# EAGLE board isoHV v0.7 (EAGLE 9.4.1)
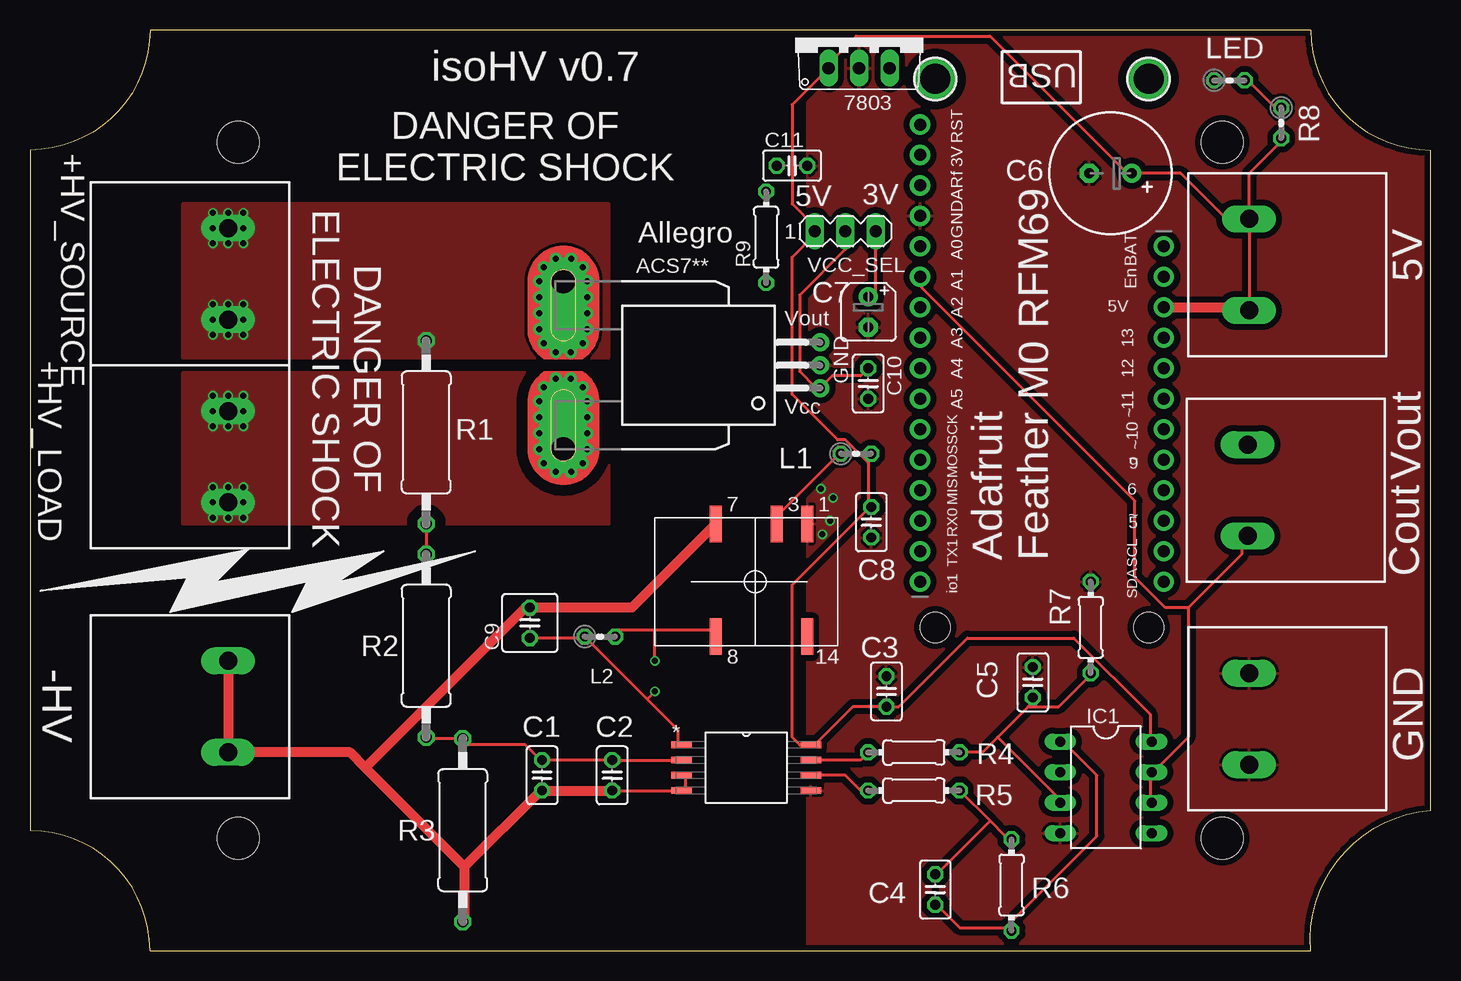
[diagram p0: board, top side]
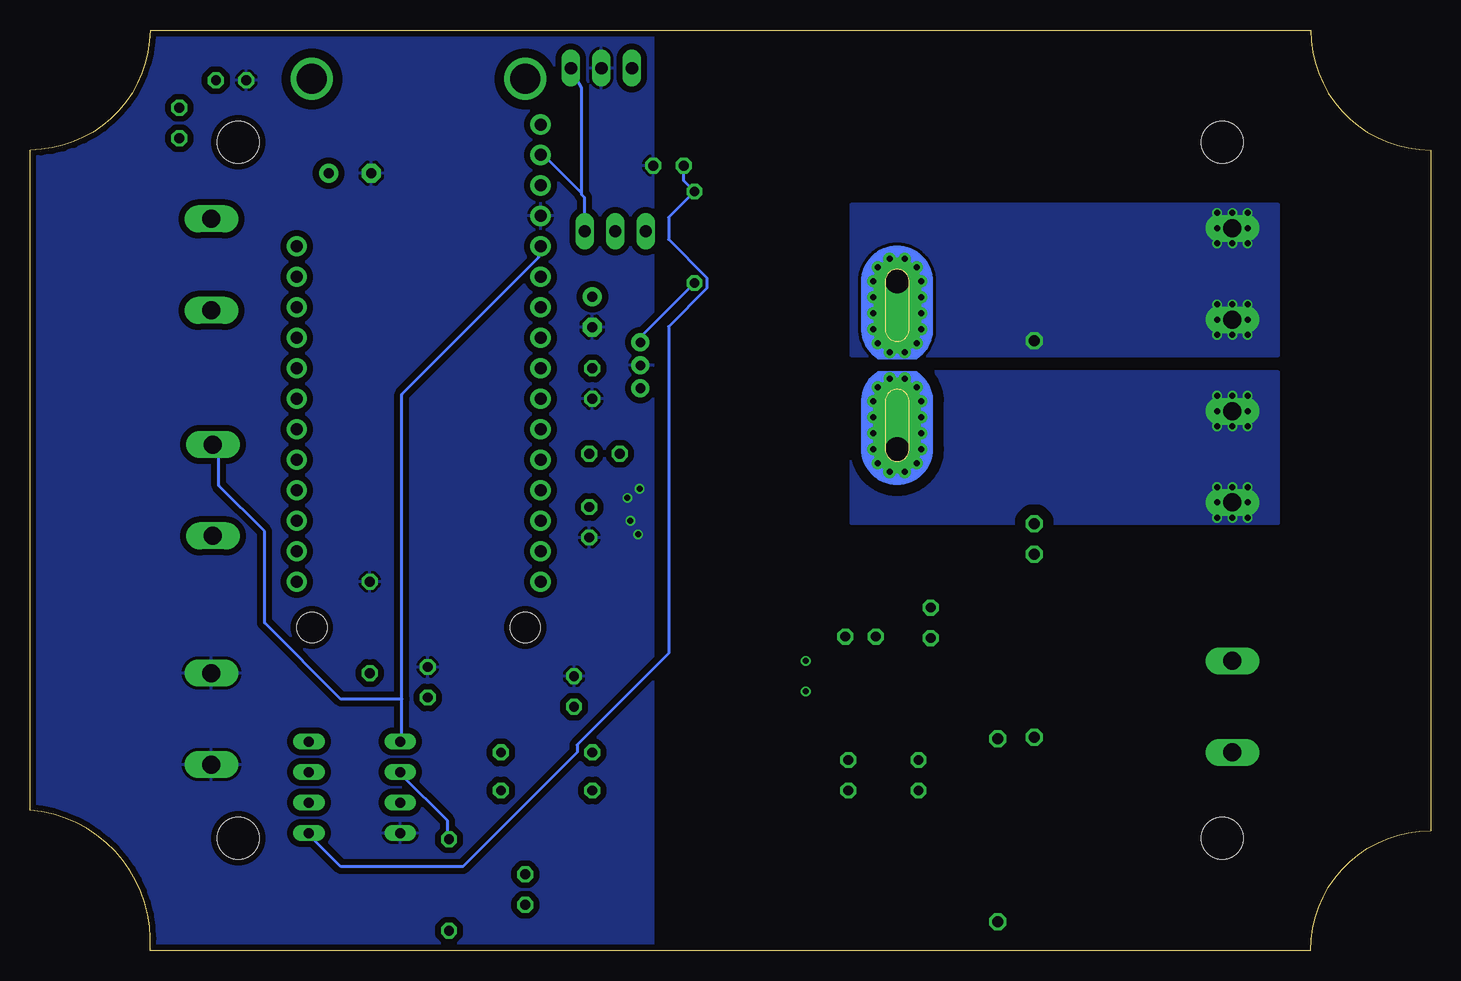
[diagram p1: board, bottom side, seen from below]

Size 116.71 x 76.71 mm. Coordinates in mm from the lower left corner, seen from the top.
Outline: 0,66.71 0,10 arc-90 10,0 106.71,0 arc-90 116.71,11.68 116.71,66.71 arc-90 106.71,76.71 10,76.71 arc-90 0,66.71
Copper layers (1*16): Top 0.07111875mm / dielectric 1.45776875mm / Bottom 0.07111875mm
Design rules "jlcpcb *": minimum track width 10mil, minimum drill 12mil, track to track 10mil, track to pad 10mil, pad to pad 10mil, via to via 10mil, smd to smd 0mil, copper to edge 10mil, drill to drill 10mil, minimum pad ring 10mil, minimum via ring 6mil, stop-mask expansion 2mil, vias tented up to drill 25mil, thermal gap 10mil
Holes 2.5 mm at 93.22,26.92 75.44,26.92
Holes 3.5 mm at 17.36,67.36 99.36,67.36 99.36,9.36 17.36,9.36

## Footprints (pad centres in the part's own frame; a part is rotated, then mirrored left to right if it is on the bottom)
TO220V = drill 1.016 long: 1 -2.54,-2.54; 2 0,-2.54; 3 2.54,-2.54
CB-PFF = drill 0.8 pad 1.5: 1 -1.91,-21.4; 2 0,-21.4; 3 1.91,-21.4 | drill 2 pad 4 offset: IP+ 7,0; IP- -7,0 | drill 0.5 pad 0.9: IP+@2 8.89,0.635; IP+@3 8.89,-0.635; IP+@4 8.175,-1.625; IP+@5 7,-2; IP+@6 5.675,-2; IP+@7 4.35,-2; IP+@8 3,-2; IP+@9 1.825,-1.625; IP+@10 1.1,-0.625; IP+@11 1.1,0.625; IP+@12 1.825,1.625; IP+@13 3,2; IP+@14 4.35,2; IP+@15 5.675,2; IP+@16 7,2; IP+@17 8.175,1.625; IP-@2 -8.89,0.635; IP-@3 -8.89,-0.635; IP-@4 -8.175,-1.625; IP-@5 -7,-2; IP-@6 -5.675,-2; IP-@7 -4.325,-2; IP-@8 -3,-2; IP-@9 -1.825,-1.625; IP-@10 -1.1,-0.625; IP-@11 -1.1,0.625; IP-@12 -1.825,1.625; IP-@13 -3,2; IP-@14 -4.325,2; IP-@15 -5.675,2; IP-@16 -7,2; IP-@17 -8.175,1.625
C025-025X050 = drill 0.813 octagon: 1 -1.27,0; 2 1.27,0
CELEC_3.5MM_10MM = drill 0.813 pad 1.6: + -1.778,0 | drill 0.813 pad 1.6 octagon: - 1.778,0
B45181A = drill 0.813 pad 1.6: + -1.27,0 | drill 0.813 pad 1.6 octagon: - 1.27,0
C025-050X050 = drill 0.813 octagon: 1 -1.27,0; 2 1.27,0
DIL08 = drill 0.813 long: 1 -3.81,-3.81; 2 -1.27,-3.81; 3 1.27,-3.81; 4 3.81,-3.81; 5 3.81,3.81; 6 1.27,3.81; 7 -1.27,3.81; 8 -3.81,3.81
1X16_ROUND = drill 1 pad 1.676: 1 -19.05,0; 2 -16.51,0; 3 -13.97,0; 4 -11.43,0; 5 -8.89,0; 6 -6.35,0; 7 -3.81,0; 8 -1.27,0; 9 1.27,0; 10 3.81,0; 11 6.35,0; 12 8.89,0; 13 11.43,0; 14 13.97,0; 15 16.51,0; 16 19.05,0
1X12_ROUND = drill 1 pad 1.676: 1 -13.97,0; 2 -11.43,0; 3 -8.89,0; 4 -6.35,0; 5 -3.81,0; 6 -1.27,0; 7 1.27,0; 8 3.81,0; 9 6.35,0; 10 8.89,0; 11 11.43,0; 12 13.97,0
0204V = drill 0.813 octagon: 1 -1.27,0; 2 1.27,0
0411/15 = drill 0.914 octagon: 1 -7.62,0; 2 7.62,0
0204/7 = drill 0.813 octagon: 1 -3.81,0; 2 3.81,0
SOIC127P1150X330-8N = smd 1.702 x 0.559: 1 -5.385,1.905; 2 -5.385,0.635; 3 -5.385,-0.635; 4 -5.385,-1.905; 5 5.385,-1.905; 6 5.385,-0.635; 7 5.385,0.635; 8 5.385,1.905
7.62MM = drill 1.5 long: P$1 0,-3.81; P$2 0,3.81
NXF1 = smd 0.991 x 3.048: P$1 0,0; P$3 2.54,0; P$7 7.62,0; P$8 7.62,9.398; P$14 0,9.398
MOUNTINGHOLE_2.5_PLATED = drill 2.5 pad 3.2: P$1 0,0
MA03-1 = drill 1.016 long: 1 -2.54,0; 2 0,0; 3 2.54,0

## Placement (x,y rotation side)
7803  7805TV  [TO220V]  69.09,76.07 0 top
ACS7**  ACS758KCB-150B-PFF-T  [CB-PFF]  44.45,48.77 90 top
C1  100pF  [C025-025X050]  42.67,14.61 270 top
C2  100nF  [C025-025X050]  48.51,14.61 270 top
C3  100nF  [C025-025X050]  71.37,21.59 90 top
C4  100nF  [C025-025X050]  75.44,5.08 270 top
C5  100nF  [C025-025X050]  83.57,22.35 90 top
C6  [CELEC_3.5MM_10MM]  90.04,64.77 180 top
C7  10uF  [B45181A]  69.85,53.21 270 top
C8  GRM21BR71A475KA73  [C025-025X050]  70.1,35.69 270 top
C9  GRM21BR71A475KA73  [C025-050X050]  41.66,27.3 90 top
C10  0.1uF  [C025-025X050]  69.85,47.24 270 top
C11  0.1uF  [C025-025X050]  63.5,65.41 0 top
IC1  AD712N  [DIL08]  89.66,13.59 270 top
JP2  [1X16_ROUND]  74.17,49.78 90 top
JP4  [1X12_ROUND]  94.49,44.7 270 top
L1  11R472C  [0204V]  68.83,41.4 0 top
L2  11R472C  [0204V]  47.5,26.16 0 top
LED  [0204V]  99.95,72.52 0 top
R1  [0411/15]  33.02,43.18 90 top
R2  [0411/15]  33.02,25.4 90 top
R3  [0411/15]  36.07,10.03 90 top
R4  10k  [0204/7]  73.66,16.51 0 top
R5  10k  [0204/7]  73.66,13.34 0 top
R6  10k  [0204/7]  81.79,5.46 270 top
R7  10k  [0204/7]  88.39,26.92 270 top
R8  200R  [0204V]  104.27,68.96 270 top
R9  1k  [0204/7]  61.34,59.44 90 top
U1  ACPL-C87x  [SOIC127P1150X330-8N]  59.69,15.24 0 top
U$1  7.62MM_TERMINAL_BLOCK  [7.62MM]  16.51,56.39 0 top
U$2  7.62MM_TERMINAL_BLOCK  [7.62MM]  16.51,20.32 0 top
U$3  7.62MM_TERMINAL_BLOCK  [7.62MM]  101.6,57.15 180 top
U$4  7.62MM_TERMINAL_BLOCK  [7.62MM]  101.6,19.3 180 top
U$5  7.62MM_TERMINAL_BLOCK  [7.62MM]  101.47,38.35 180 top
U$6  7.62MM_TERMINAL_BLOCK  [7.62MM]  16.51,41.15 0 top
U$7  NXF1  [NXF1]  64.77,35.56 180 top
U$12  MOUNTINGHOLE2.5  [MOUNTINGHOLE_2.5_PLATED]  93.22,72.64 270 top
U$13  MOUNTINGHOLE2.5  [MOUNTINGHOLE_2.5_PLATED]  75.44,72.64 270 top
VCC_SEL  [MA03-1]  67.94,59.94 0 top

## Library data of the parts
7803 = linear
ACS7** = allegro; MPN: ACS7**; OC_FARNELL: 1718995; OC_NEWARK: 04R7129
C1-C5 C7-C11 = rcl; SPICEPREFIX: C
C6 JP2 JP4 U$12 U$13 = microbuilder
IC1 = analog-devices; MF: ALTERA CORPORATION; MPN: AD712JNZ; OC_FARNELL: 9604898; OC_NEWARK: 59K4554
L1 L2 = rcl; SPICEPREFIX: L
LED R3-R9 = rcl; SPICEPREFIX: R
R1 R2 = rcl; MPN: HVR37; SPICEPREFIX: R
U1 = Avago_By_element14_Batch_1; DESCRIPTION: Precision Miniature Isolation Amplifiers; MPN: ACPL-C79B-000E; OC_FARNELL: 1854253; OC_NEWARK: 74R5803; PACKAGE: SOIC-8; SUPPLIER: AVAGO TECHNOLOGIES
U$1-U$6 = 7.62mm terminal block
U$7 = NXF1
VCC_SEL = con-lstb; OC_FARNELL: unknown; OC_NEWARK: unknown

## Nets
!RESET: JP2.16
+3V3: 7803.3 C7.+ JP2.15 VCC_SEL.3
+5V_INPUT: 7803.1 C3.1 C6.+ C8.1 IC1.8 JP4.3 L1.2 R8.2 U1.8 U$3.P$1 U$3.P$2 VCC_SEL.1
+DC-DC_OUT: C9.1 L2.1 U1.1
A0: C4.2 IC1.1 JP2.12 R6.2 U$5.P$1
A1: IC1.6 IC1.7 JP2.11 U$5.P$2
A2: JP2.10
A3: JP2.9
A4: JP2.8
A5: JP2.7
AREF: JP2.14
D0: JP2.3
D1: JP2.2
D5: JP4.10
D6: JP4.9
D9: JP4.8
D10: JP4.7
D11: JP4.6
D12: JP4.5
D13: JP4.4
DIO1: JP2.1
EN: JP4.2
GND: 7803.2 ACS7**.2 C3.2 C5.2 C6.- C7.- C8.2 C10.2 C11.2 IC1.4 JP2.13 LED.1 R7.1 U1.5 U$4.P$1 U$4.P$2 U$7.P$1
GND_HV: C1.2 C2.2 C9.2 R3.1 U1.3 U1.4 U$2.P$1 U$2.P$2 U$7.P$7
HV+_LOAD: ACS7**.IP- ACS7**.IP-@2 ACS7**.IP-@3 ACS7**.IP-@4 ACS7**.IP-@5 ACS7**.IP-@6 ACS7**.IP-@7 ACS7**.IP-@8 ACS7**.IP-@9 ACS7**.IP-@10 ACS7**.IP-@11 ACS7**.IP-@12 ACS7**.IP-@13 ACS7**.IP-@14 ACS7**.IP-@15 ACS7**.IP-@16 ACS7**.IP-@17 U$6.P$1 U$6.P$2
HV+_SOURCE: ACS7**.IP+ ACS7**.IP+@2 ACS7**.IP+@3 ACS7**.IP+@4 ACS7**.IP+@5 ACS7**.IP+@6 ACS7**.IP+@7 ACS7**.IP+@8 ACS7**.IP+@9 ACS7**.IP+@10 ACS7**.IP+@11 ACS7**.IP+@12 ACS7**.IP+@13 ACS7**.IP+@14 ACS7**.IP+@15 ACS7**.IP+@16 ACS7**.IP+@17 R1.2 U$1.P$1 U$1.P$2
MISO: JP2.4
MOSI: JP2.5
N$1: C5.1 IC1.3 R4.2 R7.2
N$2: R1.1 R2.2
N$3: ACS7**.1 C10.1 VCC_SEL.2
N$4: LED.2 R8.1
N$5: C4.1 IC1.2 R5.2 R6.1
N$6: C11.1 IC1.5 R9.2
N$7: L1.1 U$7.P$3
N$8: L2.2 U$7.P$8
N$9: ACS7**.3 R9.1
SCK: JP2.6
SCL: JP4.11
SDA: JP4.12
SIGNAL_IN: C1.1 C2.1 R2.1 R3.2 U1.2
SIGNAL_OUT+: R4.1 U1.7
SIGNAL_OUT-: R5.1 U1.6
VBAT: JP4.1

## Tracks (layer width: path | path; a pad name or v marks a point on that pad's centre or on a via)
+3V3
  Top 0.254: VCC_SEL.3 70.48,54.61 69.85,53.98 C7.+
  Bottom 0.254: 70.74,63.12 70.74,62.99 70.48,62.74 VCC_SEL.3 | 70.74,63.12 70.74,71.9 7803.3 | 70.74,63.12 73.66,66.04 JP2.15
+5V_INPUT
  Top 0.254: U$3.P$1 101.6,64.77 104.14,67.31 R8.2 | U$3.P$1 99.69,60.96 95.89,64.77 C6.+ 91.44,64.77 80.01,76.2 68.83,76.2 66.55,73.91 7803.1 66.66,73.49 66.51,73.49 63.5,70.48 63.5,62.23 65.41,60.33 VCC_SEL.1 65.41,59.69 63.5,57.78 63.5,46.35 67.31,42.55 67.94,42.55 69.85,40.64 | U$3.P$1 U$3.P$2 | 69.85,40.64 69.85,41.27 L1.2 | 69.85,40.64 69.85,37.47 C8.1 69.85,36.83 63.5,30.48 63.5,17.78 64.14,17.14 U1.8 65.41,17.14 68.58,20.32 C3.1 72.39,20.32 78.11,26.04 87,26.04 93.34,19.68 93.34,17.78 IC1.8
  Top 0.813: JP4.3 101.35,53.59 U$3.P$2
+DC-DC_OUT  (via drill 0.5)
  Top 0.254: 51.44,20.95 L2.1 45.72,26.04 C9.1 | 51.44,20.95 53.98,18.41 53.98,17.14 U1.1 | v52.07,21.59 51.44,20.95
A0
  Top 0.254: 81.28,1.91 77.47,1.91 75.56,3.81 C4.2 | 81.28,1.91 88.9,9.53 88.9,14.61 86.36,17.14 IC1.1 | 81.28,1.91 R6.2
  Bottom 0.254: 85.72,20.95 85.72,17.78 IC1.1 | 85.72,20.95 85.72,46.35 74.3,57.78 74.3,58.42 JP2.12 | 85.72,20.95 90.81,20.95 97.16,27.3 97.16,34.92 100.97,38.73 100.97,41.91 U$5.P$1
A1
  Top 0.254: IC1.6 93.34,12.7 93.34,14.61 IC1.7 93.98,15.24 96.52,17.78 96.52,28.57 | 96.52,28.57 94.61,28.57 92.08,31.11 92.08,37.47 74.3,55.24 74.3,55.88 JP2.11 | 96.52,28.57 100.97,33.02 100.97,34.29 U$5.P$2
GND  (via drill 0.5)
  other vias: 65.91,38.48 66.93,37.72 66.67,35.81 66.04,34.67
  pour Bottom (isolate 0.508): 64.77,77.47 118.11,77.47 118.11,-1.27 64.77,-1.27
  pour Top (isolate 0.508): 64.77,78.74 64.77,-2.54 119.38,-2.54 119.38,78.74
GND_HV
  Top 0.254: U1.3 54.61,14.61 54.61,13.34 U1.4 C2.2 | 36.2,2.54 R3.1 | 42.55,13.34 C1.2 | 41.27,28.57 C9.2
  Top 0.813: C9.2 50.16,28.57 U$7.P$7 | U$2.P$2 U$2.P$1 26.67,16.51 27.94,15.24 | 36.2,6.99 36.2,2.54 | 42.55,13.34 36.2,6.99 | C1.2 C2.2 | 36.2,6.99 27.94,15.24 | 27.94,15.24 41.27,28.57
HV+_LOAD  (via drill 0.5)
  other vias: 16.51,43.69 15.24,46.23 16.51,46.23 17.78,46.23 17.78,44.96 17.78,43.69 15.24,43.69 15.24,44.96 17.78,38.61 17.78,37.34 17.78,36.07 16.51,36.07 15.24,36.07 15.24,37.34 15.24,38.61 16.51,38.61
  pour Bottom (isolate 0.889, no thermals): 48.26,48.26 12.7,48.26 12.7,35.56 48.26,35.56
  pour Top (isolate 0.889, no thermals): 48.26,48.13 12.7,48.13 12.7,35.56 48.26,35.56
HV+_SOURCE  (via drill 0.5)
  other vias: 15.24,53.85 16.51,53.85 17.78,53.85 17.78,52.58 17.78,51.31 16.51,51.31 15.24,51.31 15.24,52.58 16.51,58.93 17.78,58.93 17.78,60.2 17.78,61.47 16.51,61.47 15.24,61.47 15.24,60.2 15.24,58.93
  pour Bottom (no thermals): 12.7,49.53 48.26,49.53 48.26,62.23 12.7,62.23
  pour Top (no thermals): 12.7,49.4 48.26,49.4 48.26,62.23 12.7,62.23
N$1
  Top 0.254: R4.2 79.38,16.51 80.64,17.78 | 83.19,20.32 83.82,20.95 C5.1 | 83.19,20.32 80.64,17.78 | 80.64,17.78 85.72,12.7 IC1.3 | 83.19,20.32 85.72,20.32 88.27,22.86 R7.2
N$2
  Top 0.254: R1.1 R2.2
N$3
  Top 0.254: VCC_SEL.2 67.94,58.42 64.14,54.61 64.14,48.26 65.41,46.99 ACS7**.1 66.87,47.88 69.22,47.88 C10.1
N$4
  Top 0.254: LED.2 101.6,72.39 104.14,69.85 R8.1
N$5
  Top 0.254: 80.01,10.79 81.28,9.53 R6.1 | 80.01,10.79 R5.2 | 80.01,10.79 75.56,6.35 C4.1
  Bottom 0.254: IC1.2 85.72,14.61 81.92,10.79 81.92,9.53 R6.1
N$6
  Bottom 0.254: IC1.5 93.34,9.53 90.81,6.99 80.64,6.99 71.12,16.51 71.12,17.14 63.5,24.77 63.5,51.99 60.3,55.2 60.3,56.06 63.5,59.26 63.5,61.09 R9.2 62.23,64.14 C11.1
N$7
  Top 0.254: U$7.P$3 62.23,36.2 67.31,41.27 L1.1
N$8  (via drill 0.5)
  Top 0.254: 52.07,26.67 57.15,26.67 U$7.P$8 | 52.07,26.67 48.9,26.67 L2.2 | v52.07,24.13 52.07,26.67
N$9
  Bottom 0.254: ACS7**.3 65.85,51.12 R9.1
SIGNAL_IN
  Top 0.254: R2.1 33.15,17.65 R3.2 36.2,17.14 41.27,17.14 42.55,15.88 C1.1 C2.1 U1.2
SIGNAL_OUT+
  Top 0.254: U1.7 69.22,15.88 R4.1
SIGNAL_OUT-
  Top 0.254: U1.6 67.94,14.61 69.22,13.34 R5.1

## Text on the board
tPlace: USB | RST | 3V | ARf | GND | A0 | BAT | A1 | En | A2 | 5V | A3 | 13 | A4 | 12 | A5 | 11 | ~ | SCK | 10 | ~ | MOS | 9 | ~ | MIS | 6 | RX0 | 5 | ~ | TX1 | Adafruit / Feather M0 RFM69 | SCL | io1 | SDA
tNames: isoHV v0.7 | DANGER OF / ELECTRIC SHOCK | +HV_SOURCE | 5V | 3V | Allegro | 5V | Vout | +HV_LOAD | DANGER OF / ELECTRIC SHOCK | GND | Vcc | Vout | Cout | -HV | GND